# EAGLE board QRsch_v2.0 (EAGLE 7.2.0)
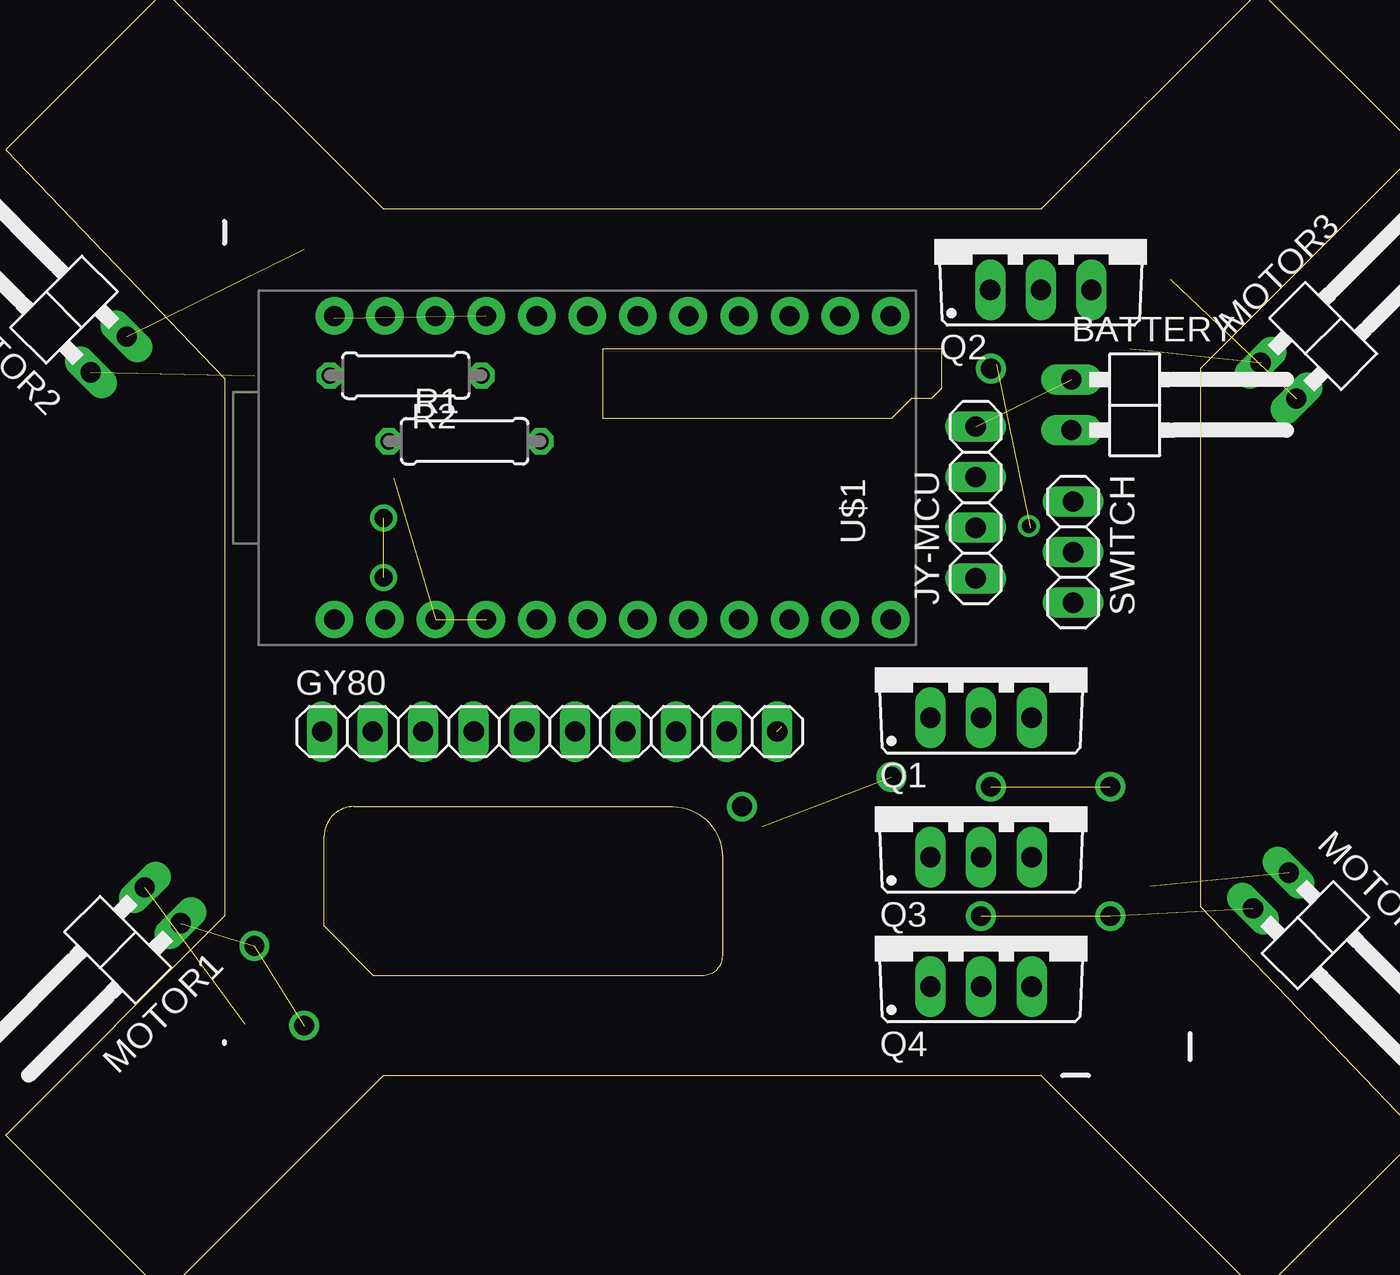
[diagram p0: board, top side]
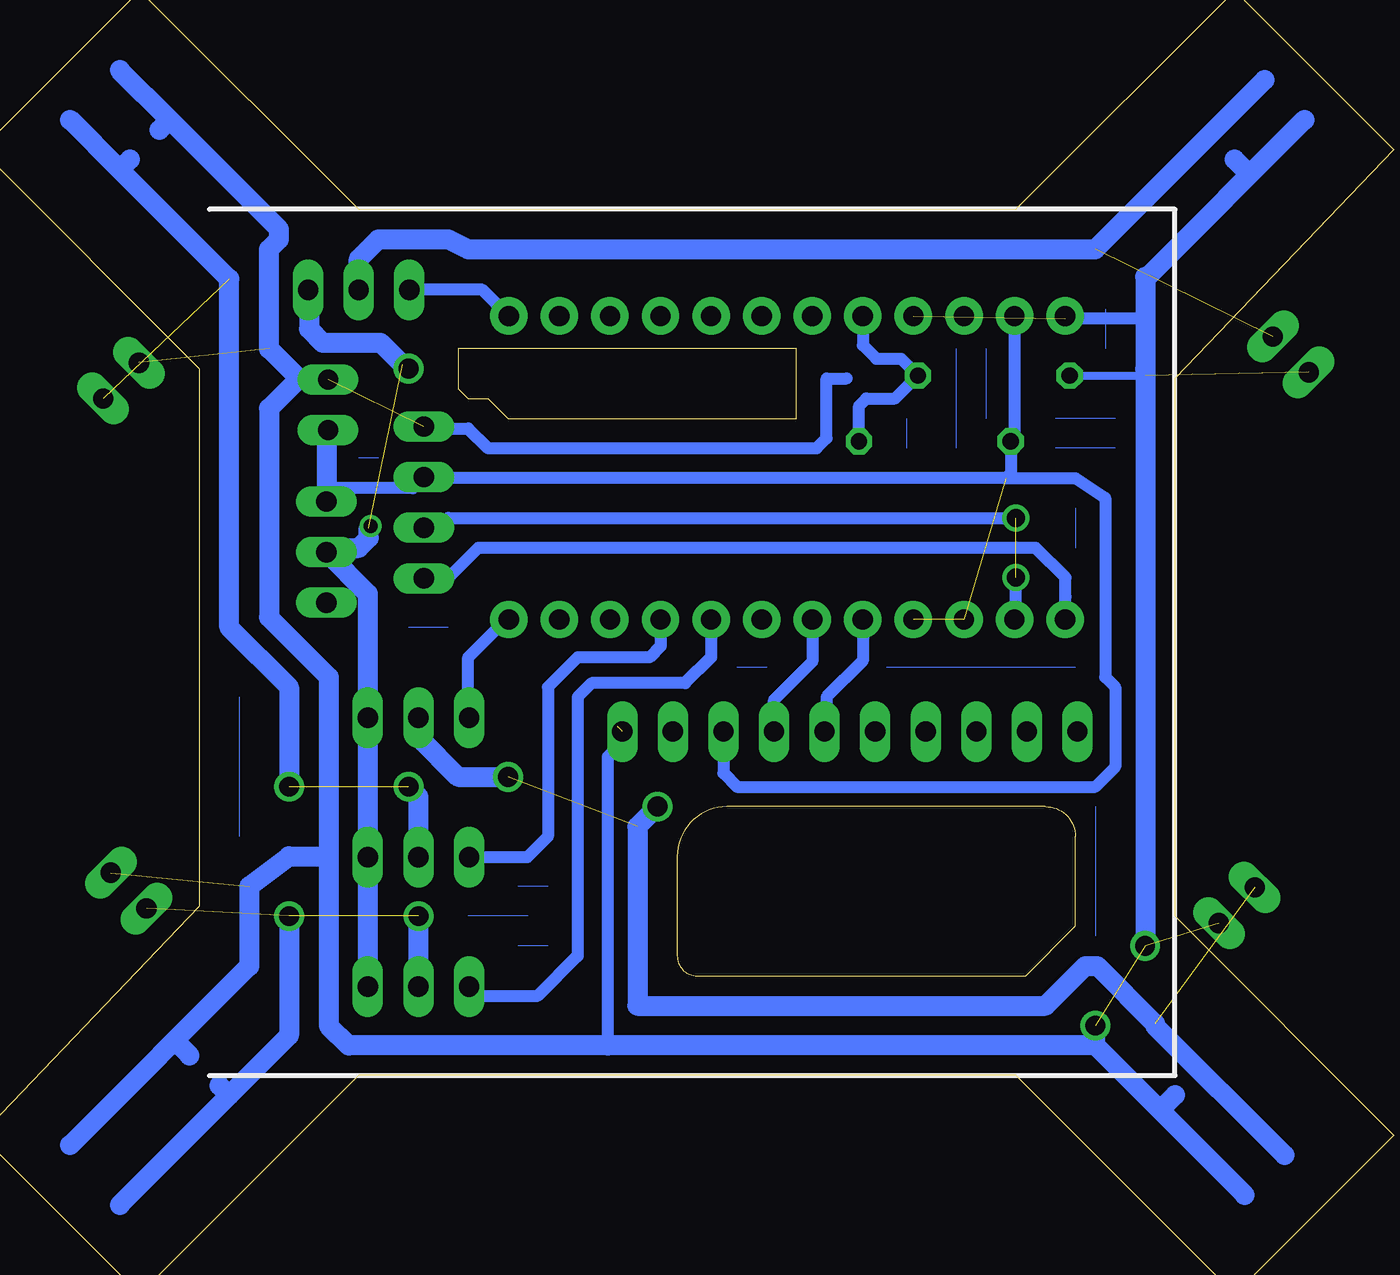
[diagram p1: board, bottom side, seen from below]

No outline drawn. Coordinates in mm, seen from the top.
Copper layers (1*16): Top 0.035mm / dielectric 1.5mm / Bottom 0.035mm
Design rules "default": minimum track width 10mil, minimum drill 24mil, track to track 8mil, track to pad 8mil, pad to pad 8mil, via to via 8mil, smd to smd 8mil, copper to edge 40mil, drill to drill 8mil, minimum pad ring 10mil, minimum via ring 8mil, stop-mask expansion 4mil, vias tented up to drill 0mil, thermal gap 10mil
Milling: 31 lines

## Footprints (pad centres in the part's own frame; a part is rotated, then mirrored left to right if it is on the bottom)
1X02/90 = drill 1.016 long: 1 -1.27,-3.81; 2 1.27,-3.81
1X10 = drill 1.016 long: 1 -11.43,0; 2 -8.89,0; 3 -6.35,0; 4 -3.81,0; 5 -1.27,0; 6 1.27,0; 7 3.81,0; 8 6.35,0; 9 8.89,0; 10 11.43,0
1X04 = drill 1.016 long: 1 -3.81,0; 2 -1.27,0; 3 1.27,0; 4 3.81,0
TO220BV = drill 1.016 long: D 0,-2.54; G -2.54,-2.54; S 2.54,-2.54
0207/7 = drill 0.813 octagon: 1 -3.81,0; 2 3.81,0
1X03 = drill 1.016 long: 1 -2.54,0; 2 0,0; 3 2.54,0
ARDUINO_PRO_MICRO = drill 1.016 pad 1.88: 1 -7.62,12.7; 2 -7.62,10.16; 3 -7.62,7.62; 4 -7.62,5.08; 5 -7.62,2.54; 6 -7.62,0; 7 -7.62,-2.54; 8 -7.62,-5.08; 9 -7.62,-7.62; 10 -7.62,-10.16; 11 -7.62,-12.7; 12 -7.62,-15.24; 13 7.62,-15.24; 14 7.62,-12.7; 15 7.62,-10.16; 16 7.62,-7.62; 17 7.62,-5.08; 18 7.62,-2.54; 19 7.62,0; 20 7.62,2.54; 21 7.62,5.08; 22 7.62,7.62; 23 7.62,10.16; 24 7.62,12.7

## Placement (x,y rotation side)
BATTERY  [1X02/90]  55.85,41.68 270 top
GY80  [1X10]  25.83,25.27 0 top
JY-MCU  [1X04]  47.23,36.78 90 top
MOTOR1  [1X02/90]  3.7,13.85 135 top
MOTOR2  [1X02/90]  0.99,46.91 45 top
MOTOR3  [1X02/90]  65.13,45.59 315 top
MOTOR4  [1X02/90]  64.75,14.59 225 top
Q1  IRF520  [TO220BV]  47.5,28.5 0 top
Q2  IRF520  [TO220BV]  50.5,50 0 top
Q3  IRF520  [TO220BV]  47.5,21.5 0 top
Q4  IRF520  [TO220BV]  47.5,15 0 top
R1  [0207/7]  21.56,39.85 0 top
R2  [0207/7]  18.6,43.15 180 top
SWITCH  [1X03]  52.12,34.28 270 top
U$1  ARDUINO_PRO_MICRO  [ARDUINO_PRO_MICRO]  27.72,38.52 90 top

## Library data of the parts
BATTERY GY80 JY-MCU MOTOR1-MOTOR4 SWITCH = pinhead
Q1-Q4 = transistor-power
R1 R2 = resistor
U$1 = SparkFun-Boards

## Nets
GND: BATTERY.2 GY80.8 JY-MCU.3 R1.1 SWITCH.1 U$1.3 U$1.4 U$1.23
N$1: R1.2 R2.1 U$1.20
N$2: Q4.G U$1.8
N$3: Q3.G U$1.9
N$4: Q1.G U$1.12
N$5: MOTOR1.2 Q1.D
N$6: JY-MCU.2 U$1.2
N$7: JY-MCU.1 U$1.1
N$8: GY80.7 U$1.6
N$9: GY80.6 U$1.5
N$11: MOTOR2.2 Q2.D
N$12: MOTOR3.2 Q3.D
N$13: MOTOR4.2 Q4.D
N$15: Q1.S Q2.S Q3.S Q4.S SWITCH.2
N$27: Q2.G U$1.13
RAW: BATTERY.1 GY80.10 JY-MCU.4 MOTOR1.1 MOTOR2.1 MOTOR3.1 MOTOR4.1 R2.2 U$1.21

## Tracks (layer width: path | path; a pad name or v marks a point on that pad's centre or on a via)
GND  (2 unrouted)
  Bottom 0.61: U$1.23 17.56,40.04 R1.1 17.75,38.25 18,38 | 18,38 14.5,38 13,37 13,28 12.5,27.5 12.5,23.5 13.5,22.5 31.5,22.5 32.18,23.18 GY80.8 | 52.12,37.5 47.78,37.5 JY-MCU.3 47.18,38 18,38
  Bottom 1.016: BATTERY.2 52.12,40.33 52.12,37.5 SWITCH.1
N$1
  Bottom 0.61: U$1.20 25.18,44.68 24.5,44 23.26,44 R2.1 23.56,42 25,42 25.37,41.63 R1.2
N$2
  Bottom 0.61: Q4.G 44.92,12 41.5,12 39.5,14 39.5,27 38.8,27.7 34.1,27.7 32.8,29 U$1.8
N$3
  Bottom 0.61: Q3.G 42.04,18.96 41,20 41,27.5 39.5,29 35.9,29 35.34,29.56 U$1.9
N$4
  Bottom 0.61: Q1.G 45,26 45,29 43.1,30.9 U$1.12
N$5  (via drill 1)  (2 unrouted)
  Bottom 1.016: Q1.D 47.5,25 45.5,23 v43,23 | 4,4 10.5,10.5 10.5,10.6 13.4,13.5 14,13.5 16,11.5 36.5,11.5 36.5,20.5 v35.5,21.5
N$6  (via drill 0.9)  (1 unrouted)
  Bottom 0.61: U$1.2 17.5,30.9 v17.5,33 | JY-MCU.2 46,35.51 46,36 v17.5,36
N$7
  Bottom 0.61: 47.2,33 JY-MCU.1 46.03,32.97 44.5,34.5 16.5,34.5 15,33 15,32.04 15.02,32.02 U$1.1
N$8
  Bottom 0.61: U$1.6 27.72,28.78 29.64,26.86 GY80.7
N$9
  Bottom 0.61: U$1.5 25.18,28.82 27,27 27,25.37 GY80.6
N$11  (1 unrouted)
  Bottom 1.016: Q2.D 50.5,49 49.5,50 46,50 45,49.5 13.5,49.5 5,58
N$12  (via drill 1)  (2 unrouted)
  Bottom 1.016: 54,22.5 54,27.5 57,30.5 57,48 62.5,53.5 | Q3.D 47.5,22 v48,22.5 | 62.5,53.5 65,56 | 62.5,53.5 62,54
N$13  (via drill 1)  (2 unrouted)
  Bottom 1.016: 47.5,11.5 Q4.D v47.5,16 | v54,16 54,10 57,7 | 57,7 62.5,1.5 | 57,7 57.5,7.5
N$14  (via drill 1)
  other vias: 48,43.5
N$15  (1 unrouted)
  Bottom 1.016: Q4.S Q3.S Q1.S 50.04,32.2 SWITCH.2 51.9,34.5 50.5,34.5 50,35 50,35.5 | Q2.S 53,47.42 53,45.5 52.3,44.8 49.4,44.8 48.3,43.7
N$18  (via drill 1)
  other vias: 54,22.5
N$19  (via drill 0.7 pad 1.02)
  other vias: 49.9,35.6
N$27
  Bottom 0.61: U$1.13 44.28,47.46 Q2.G
N$28
  Bottom 0: 13.5,21.5 13.5,15
N$30
  Bottom 0.61: 47,40.5 45,40.5 44,39.5 27.5,39.5 27,40 27,43 26,43
N$33
  Bottom 0: 14.5,28.5 24,28.5
N$34
  Bottom 0: 30,28.5 31.5,28.5
N$35
  Bottom 0: 42,16 45,16
N$36
  Bottom 0: 46,30.5 48,30.5
N$41
  Bottom 0: 49.5,39 50.5,39
N$42
  Bottom 0: 12.5,41 15.5,41
N$43
  Bottom 0: 12.5,39.5 15.5,39.5
N$44
  Bottom 0: 41,17.5 42.5,17.5
N$45
  Bottom 0: 41,14.5 42.5,14.5
N$46
  Bottom 0: 56.5,27 56.5,20
N$47
  Bottom 0: 14.5,36.5 14.5,34.5
N$48
  Bottom 0: 13,46.5 13,44.5
N$49
  Bottom 0: 20.5,44.5 20.5,39.5
N$50
  Bottom 1.016: 59.5,9.5 59,9
N$51
  Bottom 0: 23,41 23,39.5
N$52
  Bottom 0: 19,44.5 19,41
N$53
  Bottom 1.016: 10,6.5 9.5,7
N$54
  Bottom 1.016: 6,53.5 6.5,54
RAW  (via drill 1)  (8 unrouted)
  Bottom 0.406: R2.2 11,43.15 11,43.5
  Bottom 0.61: 37.5,25.53 37.5,24.5 38,24 38,9.5 | 11,46 15,46
  Bottom 1.016: 52,19 52,28 55,31 55,41.5 53.5,43 | 52,19 52,10.5 51,9.5 38,9.5 13.5,9.5 | BATTERY.1 52.09,43 53.5,43 | 53.5,43 55,44.5 55,49.5 54.5,50 54.5,50.5 60,56 | 52,19 54,19 56,17.5 56,13.5 65,4.5 | 13.5,9.5 v13.5,10.5 | v11,14.5 11,43.5 11,46 11,48.1 10.9,48.1 3,56 | 13.5,9.5 6,2 | 60,56 62.5,58.5 | 60,56 60.5,55.5